# Altium PCB PCB_VOC.PcbDoc
Units mm, origin at the board's own origin, x right, y up, seen from the top; angles counter-clockwise.
Board outline 35 x 47.5 mm, 4 copper layers (Top Layer, Int1 (GND), Int2 (GND), Bottom Layer), stack 1.586 mm thick; 49 components, 27 nets, 197 pads, 124 vias.
Unrouted connection lines stored in the file: 1.
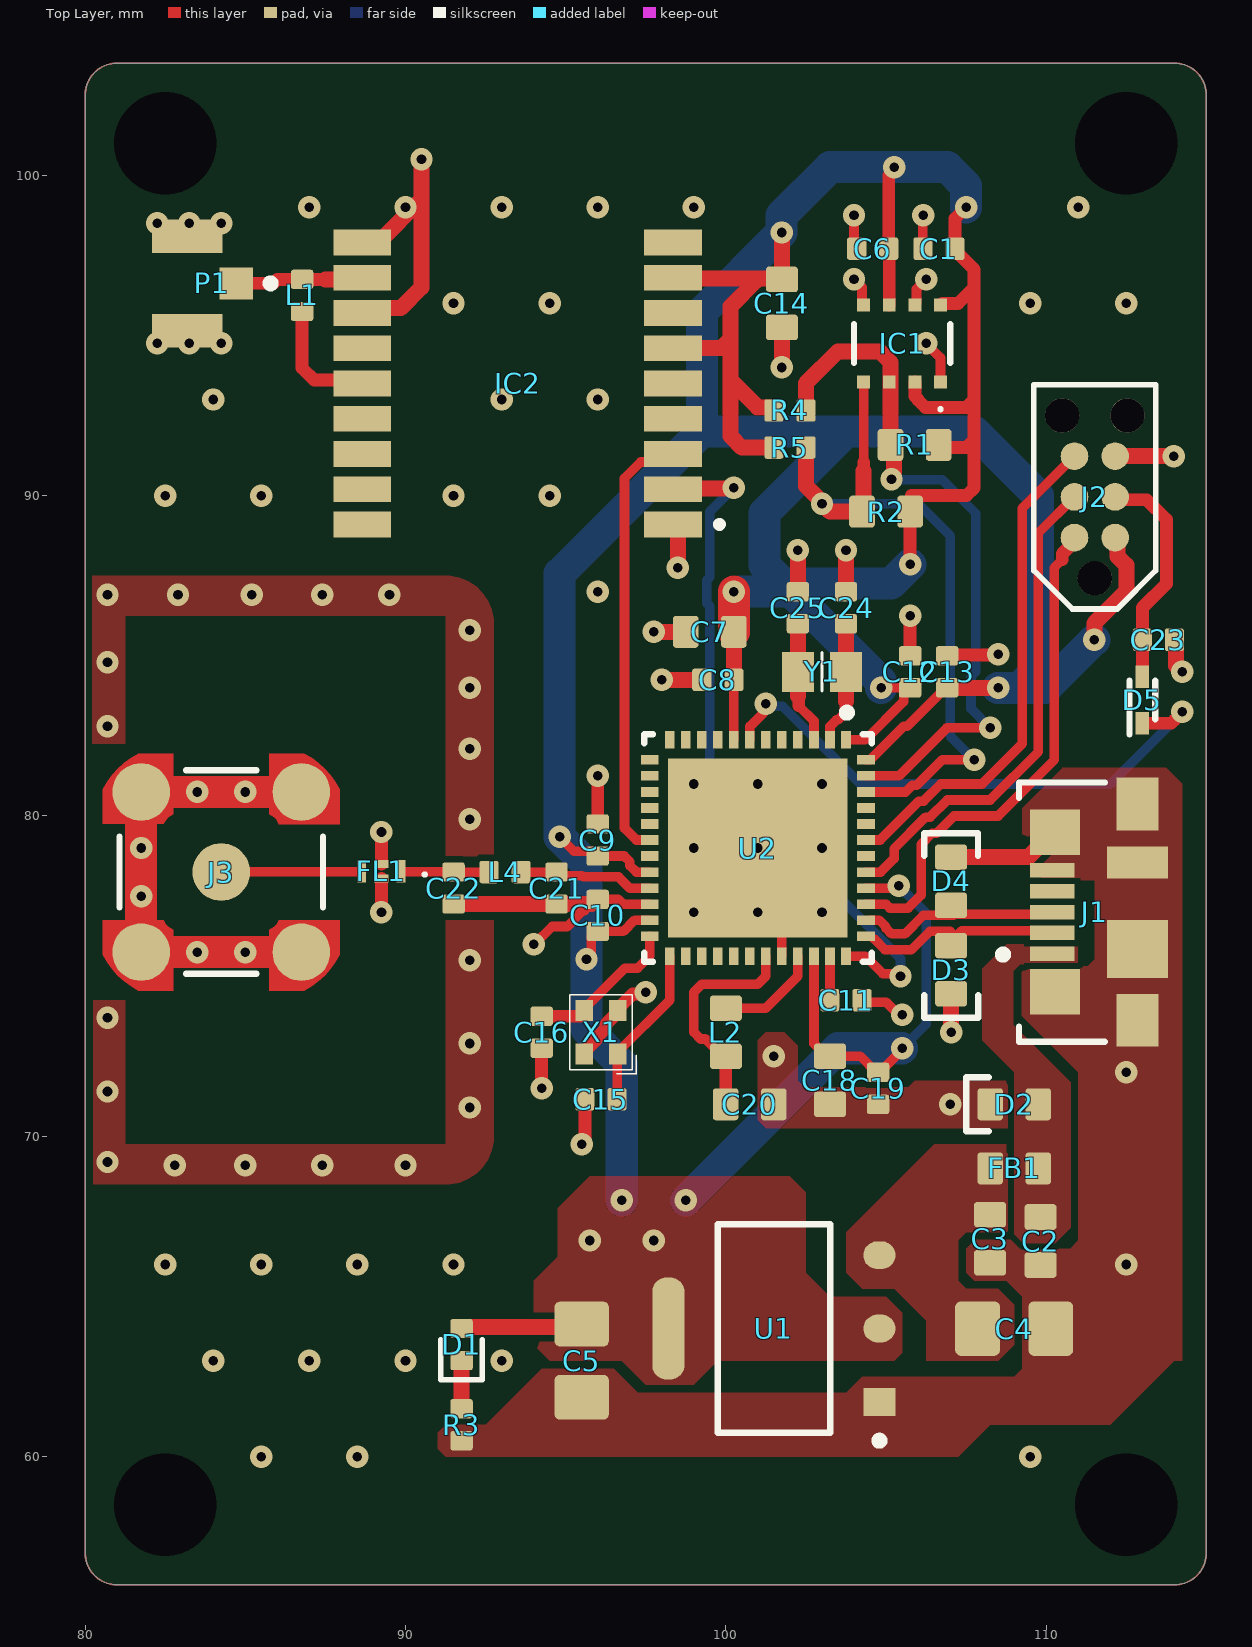
[diagram p0: Top Layer view]
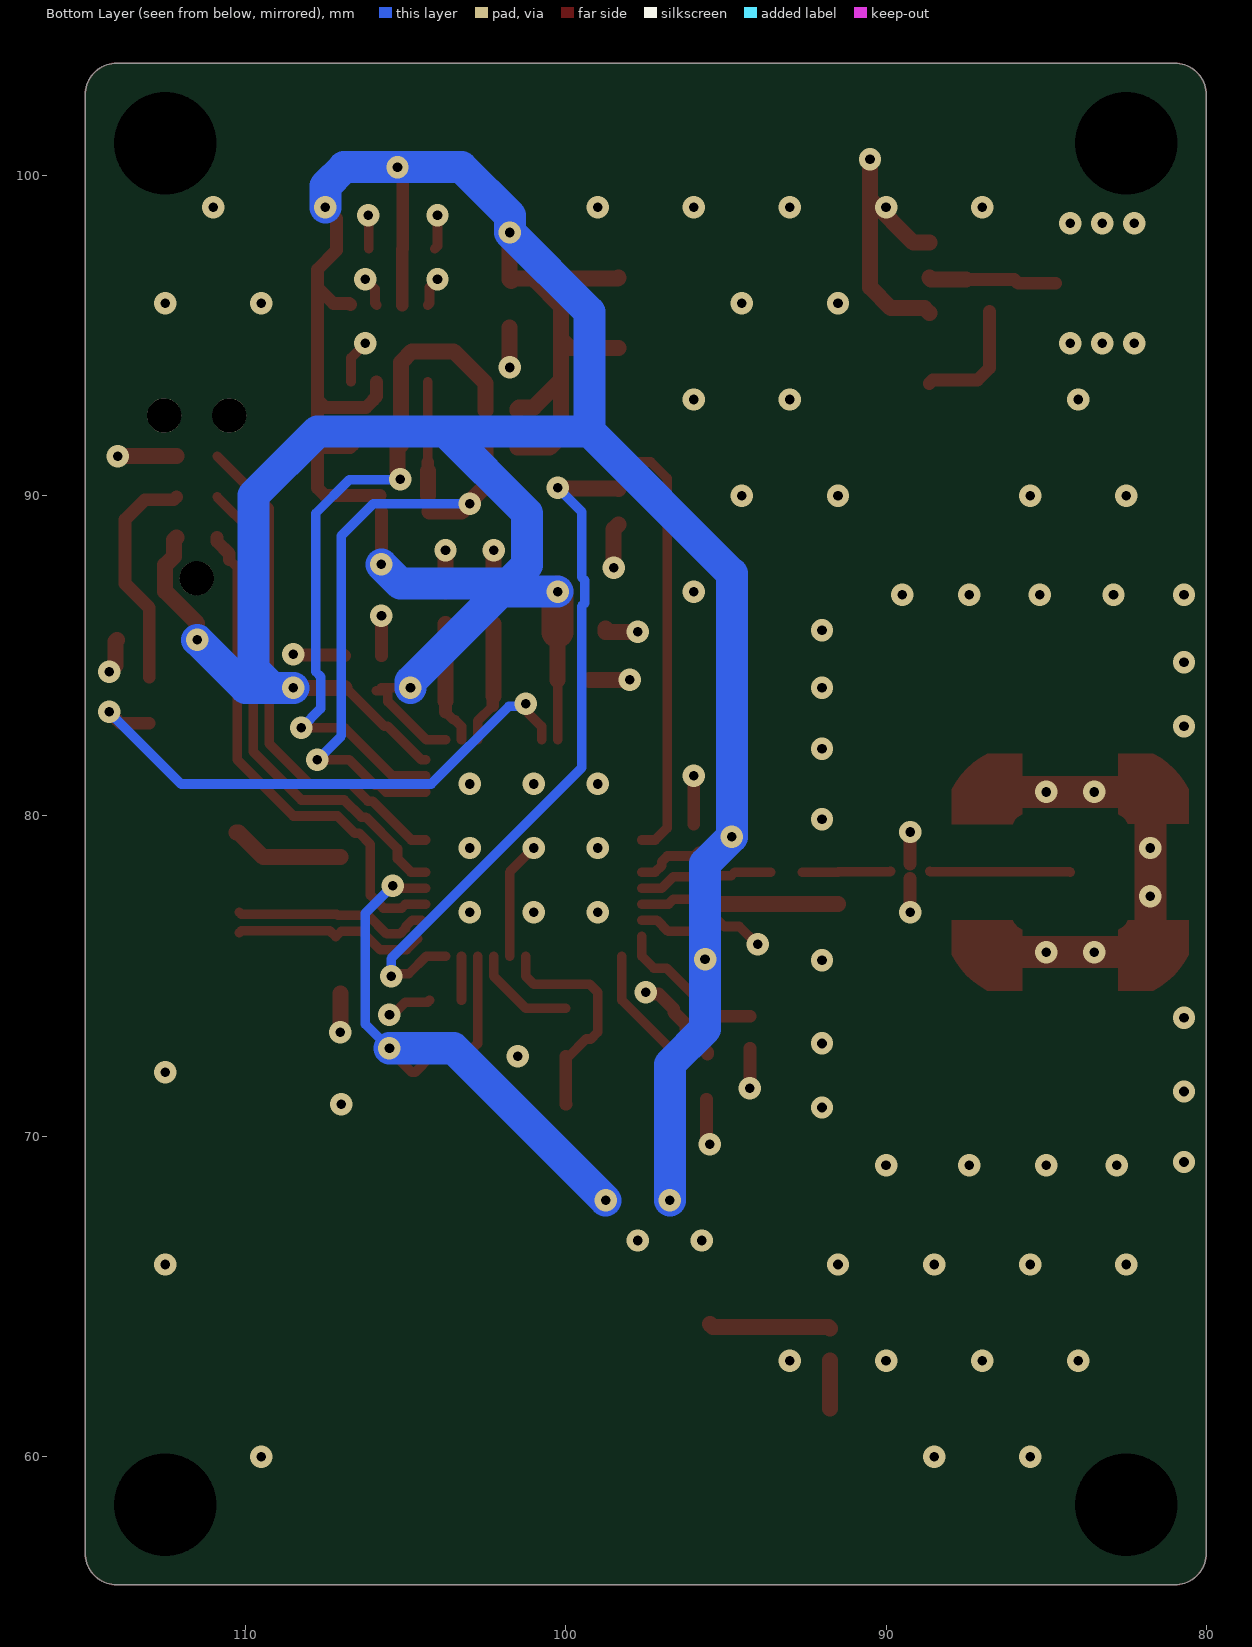
[diagram p1: Bottom Layer view, seen from below]
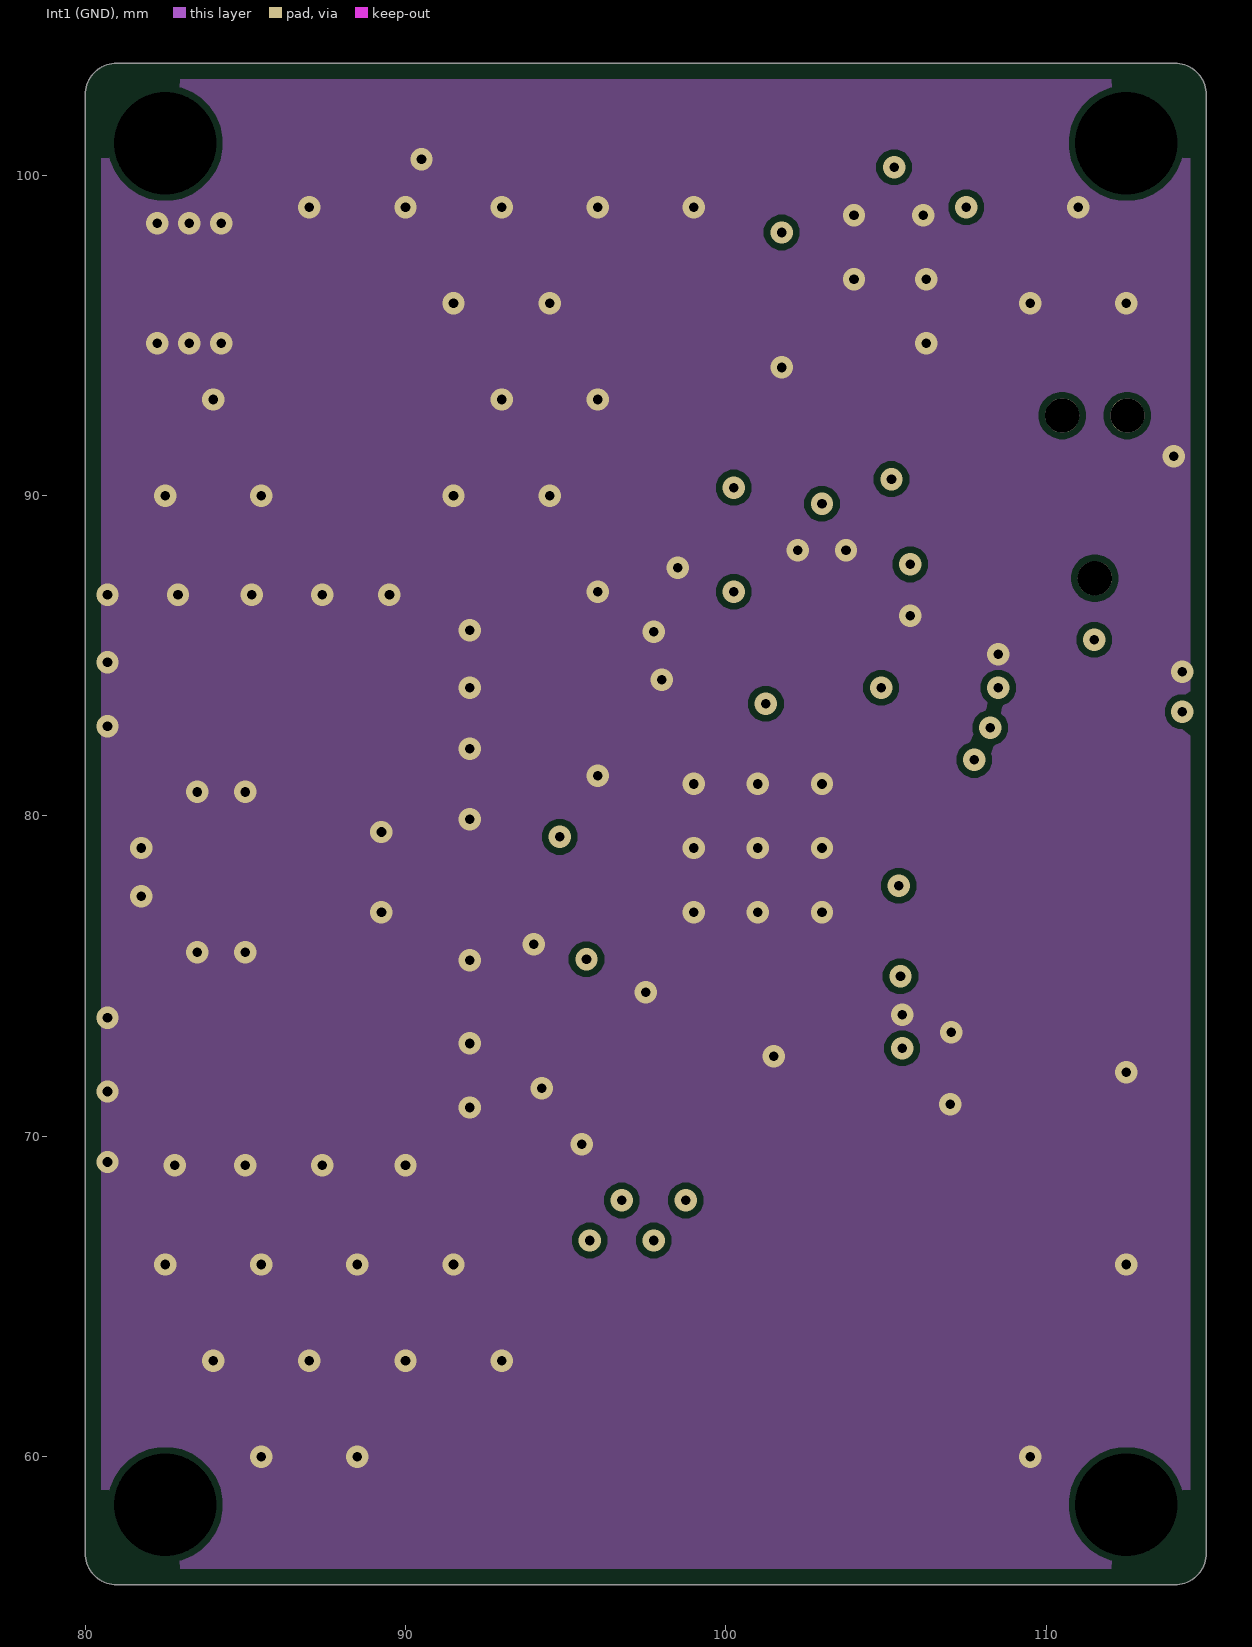
[diagram p2: Int1 (GND)]
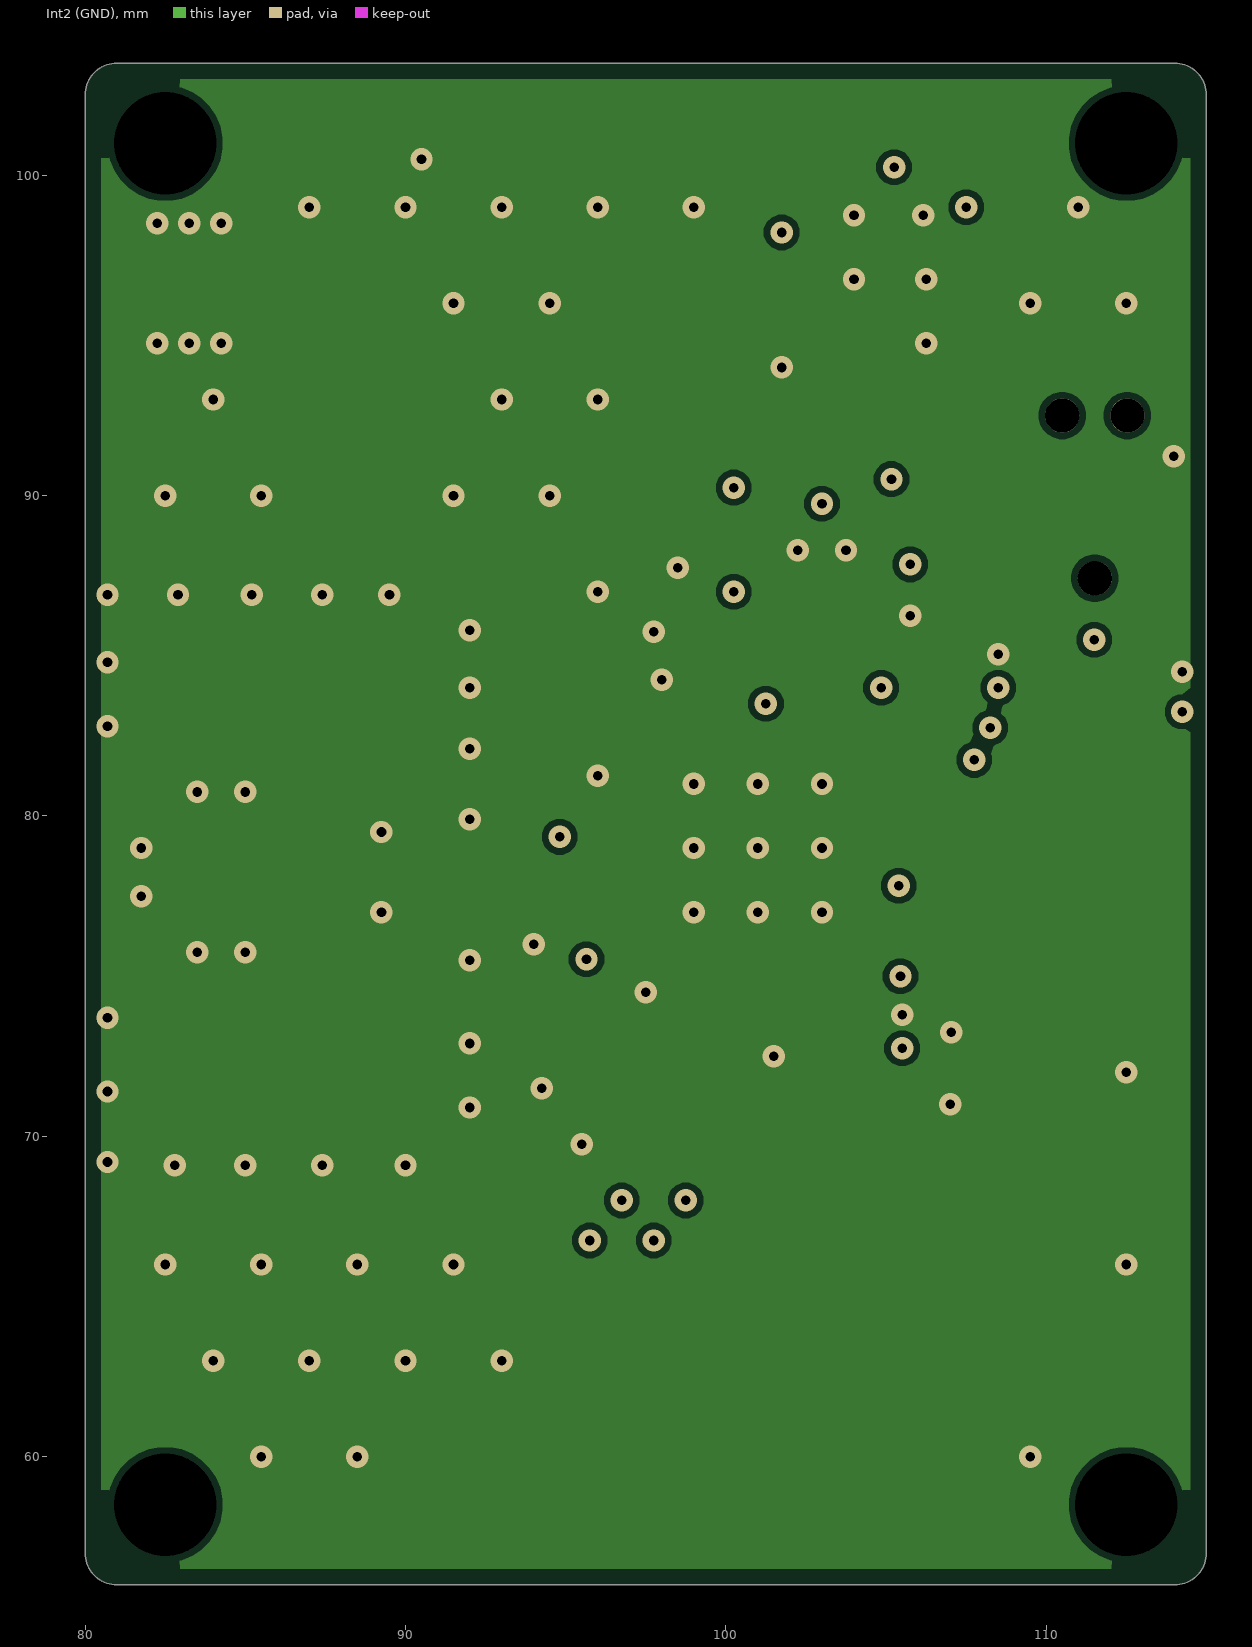
[diagram p3: Int2 (GND)]
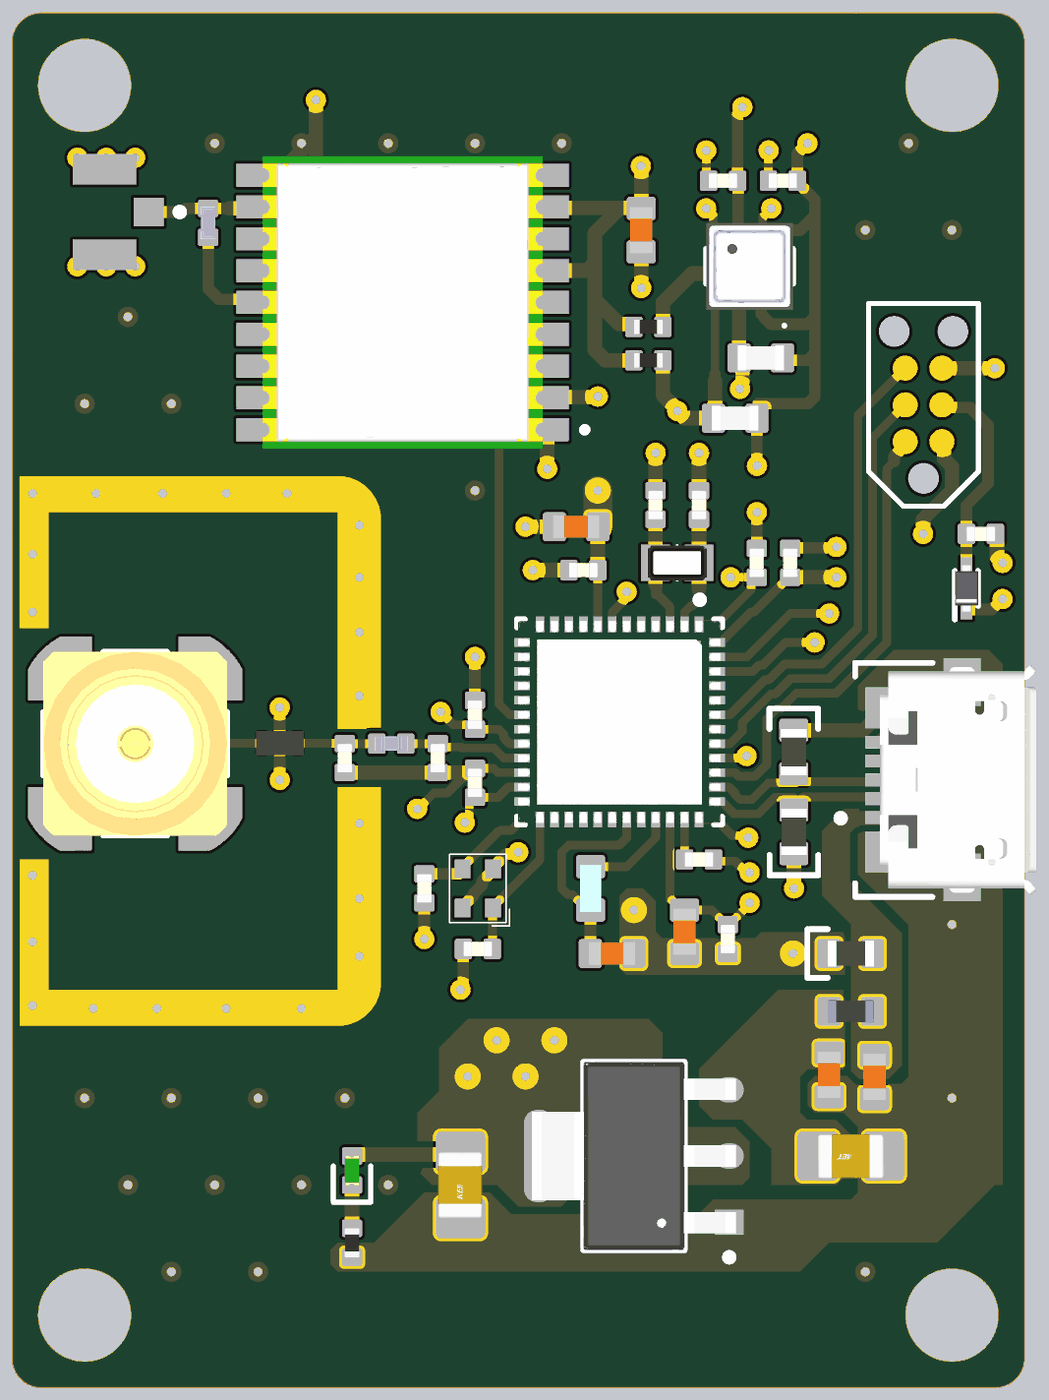
[diagram p4: 3D render of the assembled board from above, using the file's embedded part models]

## Layer stack, top to bottom
Top Solder: solder mask 0.0254, SM-001, Dk 4
Top Layer: signal copper 0.035
Dielectric 1: prepreg 0.2104, PP-017, Dk 4.4
Int1 (GND): signal copper 0.0152
Dielectric 3: core 1.065, Core-039, Dk 4.6
Int2 (GND): signal copper 0.0152
Dielectric 5: prepreg 0.2104, PP-017, Dk 4.4
Bottom Layer: signal copper 0.035
Bottom Solder: solder mask 0.0254, SM-001, Dk 4

## Board outline
80,57 80,102.5 cw(c81,102.5) 81,103.5 114,103.5 cw(c114,102.5) 115,102.5 115,57 cw(c114,57) 114,56 81,56 cw(c81,57)

## Design rules (kind name [scope] priority, off if disabled: settings)
Clearance [All] p1: gap=0.2 ignorepadtopadclearanceinfootprint=FALSE
DiffPairsRouting [All] p1: maxlimit=0.254 minlimit=0.2 mostfreqgap=0.254 toplayer_prefgap=0.225 toplayer_minwidth=0.2 toplayer_maxwidth=0.4 toplayer_prefwidth=0.296 midlayer1_mingap=0.254 midlayer1_minwidth=0.381 midlayer1_maxwidth=0.381 midlayer1_prefwidth=0.381 midlayer2_mingap=0.254 midlayer2_minwidth=0.381 midlayer2_maxwidth=0.381 midlayer2_prefwidth=0.381 bottomlayer_mingap=0.254 bottomlayer_minwidth=0.381 bottomlayer_maxwidth=0.381 bottomlayer_prefwidth=0.381 maxuncoupledlength=12.7
PolygonConnect [All] p1: connectstyle=Direct reliefconductorwidth=0.254 reliefentries=4 polygonreliefangle="90 Angle" airgapwidth=0.254
RoutingVias [All] p1: holewidth=0.711 width=1.27 viastyle="Through Hole" minholewidth=0.711 minwidth=1.27 maxholewidth=0.711 maxwidth=1.27
SolderMaskExpansion [All] p1: expansion=0.102 istentingtop=FALSE
SupplyNets "Schematic Supply Nets_2" [InNet('+3V3')] p1: voltage=0.000
SupplyNets "Schematic Supply Nets_1" [InNet('GND')] p2: voltage=0.000
SupplyNets "Schematic Supply Nets" [InNet('VBUS')] p3: voltage=0.000
UnRoutedNet [All] p1: checkbadconnections=TRUE
Width [All] p1: maxlimit=1 minlimit=0.2 preferedwidth=0.3 midlayer1_minwidth=0.254 midlayer1_maxwidth=0.254 midlayer1_prefwidth=0.254 midlayer2_minwidth=0.254 midlayer2_maxwidth=0.254 midlayer2_prefwidth=0.254 minimp=50.000000 maximp=50.000000 favimp=50.000000
28 further rules are at their usual default settings.

## Classes and differential pairs
differential pair class DIFF_USB: USB_D
differential pair USB_D: +USB_D_P -USB_D_N

## Components (designator, comment, footprint, x,y, rotation, side; value= is the part's Value field where it differs from the comment)
C1 "100nF" CAP_0402 106.651,97.707 r0 top
C2 "2.2nF" CAP_0603 109.822,66.733 r90 top
C3 "2.2nF" CAP_0603 108.247,66.806 r90 top
C4 "22uF" CAP_0805 109,64 r180 top
C5 "22uF" CAP_0805 95.5,63 r90 top
C6 "100nF" CAP_0402 104.583,97.707 r0 top
C7 "4.7uF" CAP_0603 99.5,85.75 r0 top
C8 "100nF" CAP_0402 99.75,84.25 r0 top
C9 "100nF" CAP_0402 96,79.25 r270 top
C10 "100nF" CAP_0402 96,76.898 r270 top
C11 "100nF" CAP_0402 103.75,74.25 r180 top
C12 "100nF" CAP_0402 105.75,84.5 r270 top
C13 "100nF" CAP_0402 106.907,84.5 r270 top
C14 "10uF" CAP_0603 101.75,96 r90 top
C15 "7pf" CAP_0402 96.1,71.157 r0 top
C16 "7pf" CAP_0402 94.25,73.25 r90 top
C18 "4.7uF" CAP_0603 103.25,71.75 r90 top
C19 "100nF" CAP_0402 104.75,71.5 r90 top
C20 "4.7uF" CAP_0603 100.743,71 r180 top
C21 "0.8pF" CAP_0402 94.715,77.75 r90 top
C22 "0.3pF" CAP_0402 91.5,77.75 r90 top
C23 "100nF" CAP_0402 113.5,85.5 r180 top
C24 "10pF" CAP_0402 103.75,86.5 r270 top
C25 "10pF" CAP_0402 102.25,86.5 r270 top
D1 "GREEN" LED_0402_GREEN 91.75,63.5 r270 top
D2 "D_TVS_BI_0603" D_0603 109,71 r0 top
D3 "BI_TVS" D_0603 107.032,75.202 r90 top
D4 "BI_TVS" D_0603 107.029,77.963 r270 top
D5 "BAT54KFILM" SODFL1608X70N 113,83.618 r90 top
FB1 "120" FB_0603 109,69 r180 top
FL1 "DLF162500LT-5028A1" DLF162500LT5028A1 89.25,78.273 r180 top
IC1 "BME688" BME688 105.5,94.75 r270 top
IC2 "ATGM336H-5N31" ATGM336H5N31 93.5,93.5 r0 top
J1 "473460001" FP-473460001-MFG 112.5,77 r90 top
J2 "TC2030-NL" TC2030-NL-FP 111.516,89.96 r90 top
J3 "32K10A-40ML5" ROS-32K10A-40ML5_V 84.25,78.25 r270 top
L1 "47nH" IND_0402 86.772,96.25 r90 top
L2 "10nH" IND_0603 100,73.25 r90 top
L4 "2.7nH" IND_0402 93.107,78.25 r180 top
P1 "U.FL-R-SMT(01)" HRS-U.FL-R-SMT(10)_V 83.19,96.626 r180 top
R1 "4.7k" RES_0603 105.889,91.584 r0 top
R2 "4.7k" RES_0603 105,89.5 r0 top
R3 "1k" RES_0402 91.75,61 r90 top
R4 "4.7k" RES_0402 102,92.657 r180 top
R5 "4.7k" RES_0402 102,91.5 r180 top
U1 "AMS1117-3.3" FP-AMS1117-IPC_C 101.5,64 r180 top
U2 "STM32WB55CEU6" FP-UFQFPN48-A0B9-MFG 101,79 r270 top
X1 "NX2016_32MHz" PCBComponent_1 96.1,73.25 r90 top
Y1 "NX2012_32k768" NX2012SA32768KSTDMUB1 103,84.5 r0 top

## Footprints (in the part's own frame and the unit in brackets; to place one, negate y for a bottom-side part, rotate by r counter-clockwise, add the part's x,y. Pads: shape width x height; smd on the part's side, far side on the other; paste and mask are expansions set on the pad)
ATGM336H5N31 [mm]
  rect 1.8x0.8 smd: 1(4.85,-4.4) 2(4.85,-3.3) 3(4.85,-2.2) 4(4.85,-1.1) 5(4.85,0) 6(4.85,1.1) 7(4.85,2.2) 8(4.85,3.3) 9(4.85,4.4) 10(-4.85,4.4) 11(-4.85,3.3) 12(-4.85,2.2) 13(-4.85,1.1) 14(-4.85,0) 15(-4.85,-1.1) 16(-4.85,-2.2) 17(-4.85,-3.3) 18(-4.85,-4.4)
  silkscreen extent 6.2,-4.5 6.4,-4.3, body extent -4.85,-5.05 4.85,5.05, height 2.4
BME688 [mm]
  rect 0.4x0.4 smd: 1(1.2,1.2) 2(1.2,0.4) 3(1.2,-0.4) 4(1.2,-1.2) 5(-1.2,-1.2) 6(-1.2,-0.4) 7(-1.2,0.4) 8(-1.2,1.2)
  silkscreen extent -0.6,-1.5 2.1,1.5, body extent -1.5,-1.5 1.5,1.5, height 0.93
CAP_0402 [mm]
  rrect25% 0.6x0.7 smd: 1(-0.5,0) 2(0.5,0)
  body extent -0.5,-0.26 0.5,0.26, height 0.37
CAP_0603 [mm]
  rrect25% 0.8x1 smd: 1(-0.75,0) 2(0.75,0)
  body extent -0.8,-0.4 0.8,0.4, height 0.51
CAP_0805 [mm]
  rrect25% 1.4x1.7 smd: 1(-1.143,0) 2(1.143,0)
  body extent -1.15,-0.76 1.15,0.79, height 1.01
D_0603 [mm]
  rrect25% 0.8x1 smd: A(0.75,0) K(-0.75,0)
  silkscreen extent -1.5,-0.84 -0.8,0.84, body extent -0.8,-0.45 0.8,0.45, height 0.81
DLF162500LT5028A1 [mm]
  rect 0.275x0.7 smd: 1(-0.612,0) 3(0.613,0)
  rect 0.45x0.245 smd: 2(0,-0.227) 4(0,0.227)
  silkscreen extent -1.4,0.05 -1.3,0.15, body extent -0.83,-0.42 0.83,0.42, height 0.26
FB_0603 [mm]
  rrect25% 0.8x1 smd: 1(-0.75,0) 2(0.75,0)
  body extent -0.8,-0.4 0.8,0.4, height 0.81
FP-473460001-MFG [mm]
  rect 0.45x1.38 smd paste+0 mask+0: 1(-1.3,2.31) 2(-0.65,2.31) 3(0,2.31) 4(0.65,2.31) 5(1.3,2.31)
  rect 1.425x1.55 smd paste+0 mask+0: 6(-2.488,2.225) 7(2.488,2.225)
  rect 1.65x1.3 smd paste+0 mask+0: 8(-3.375,-0.35) 11(3.375,-0.35)
  rect 1.8x1.9 smd paste+0 mask+0: 9(-1.15,-0.35)
  rect 1x1.9 smd paste+0 mask+0: 10(1.55,-0.35)
  silkscreen extent -4.05,0.67 4.05,3.97, body extent -4.3,-2.48 4.3,3.45, height 0.25
FP-AMS1117-IPC_C [mm]
  rect 1.004x0.872 smd paste+0 mask+0: 1(-3.295,2.29)
  rrect100% 1.004x0.872 smd paste+0 mask+0: 2(-3.295,0) 3(-3.295,-2.29)
  rrect87% 1.004x3.182 smd paste+0 mask+0: 4(3.295,0)
  silkscreen extent -3.42,-3.25 1.75,3.62, body extent -3.9,-3.35 3.9,3.35, height 0.25
FP-UFQFPN48-A0B9-MFG [mm]
  rect 0.55x0.3 smd paste+0 mask+0: 1(-3.375,2.75) 2(-3.375,2.25) 3(-3.375,1.75) 4(-3.375,1.25) 5(-3.375,0.75) 6(-3.375,0.25) 7(-3.375,-0.25) 8(-3.375,-0.75) 9(-3.375,-1.25) 10(-3.375,-1.75) 11(-3.375,-2.25) 12(-3.375,-2.75) 25(3.375,-2.75) 26(3.375,-2.25) 27(3.375,-1.75) 28(3.375,-1.25) 29(3.375,-0.75) 30(3.375,-0.25) 31(3.375,0.25) 32(3.375,0.75) 33(3.375,1.25) 34(3.375,1.75) 35(3.375,2.25) 36(3.375,2.75)
  rect 0.3x0.55 smd paste+0 mask+0: 13(-2.75,-3.375) 14(-2.25,-3.375) 15(-1.75,-3.375) 16(-1.25,-3.375) 17(-0.75,-3.375) 18(-0.25,-3.375) 19(0.25,-3.375) 20(0.75,-3.375) 21(1.25,-3.375) 22(1.75,-3.375) 23(2.25,-3.375) 24(2.75,-3.375) 37(2.75,3.375) 38(2.25,3.375) 39(1.75,3.375) 40(1.25,3.375) 41(0.75,3.375) 42(0.25,3.375) 43(-0.25,3.375) 44(-0.75,3.375) 45(-1.25,3.375) 46(-1.75,3.375) 47(-2.25,3.375) 48(-2.75,3.375)
  rect 5.6x5.6 smd paste+0 mask+0: 49(0,0)
  silkscreen extent -4.35,-3.55 3.55,3.55, body extent -3.75,-3.75 3.75,3.75, height 0.25
HRS-U.FL-R-SMT(10)_V [mm] "Connector, 3-Leads, Body 2.6x2.6mm"
  rect 1.05x1 smd: 1(-1.525,0)
  rect 2.2x1.05 smd: 2(0,-1.475) 3(0,1.475)
  silkscreen extent -2.73,-0.12 -2.48,0.12, body extent -1.3,-1.3 1.3,1.3, height 1.25
IND_0402 [mm]
  rrect25% 0.6x0.7 smd: 1(-0.5,0) 2(0.5,0)
  body extent -0.56,-0.26 0.56,0.26, height 0.67
IND_0603 [mm]
  rrect25% 0.8x1 smd: 1(-0.75,0) 2(0.75,0)
  body extent -0.81,-0.37 0.81,0.37, height 0.87
LED_0402_GREEN [mm]
  rrect25% 0.6x0.7 smd: A(-0.5,0) K(0.5,0)
  silkscreen extent -0.15,-0.65 1.1,0.65, body extent -0.51,-0.25 0.51,0.25, height 0.45
NX2012SA32768KSTDMUB1 [mm]
  rect 1x1.25 smd: 1(-0.75,0) 2(0.75,0)
  silkscreen extent 0,-0.6 0,0.6, body extent -1.02,-0.6 1.02,0.6, height 0.55
PCBComponent_1 [mm]
  rect 0.65x0.55 smd: 1(-0.675,-0.525) 2(0.675,-0.525) 3(0.675,0.525) 4(-0.675,0.525)
  silkscreen extent -1.3,-1.1 1.17,0.97
RES_0402 [mm]
  rrect25% 0.6x0.7 smd: 1(-0.5,0) 2(0.5,0)
  body extent -0.5,-0.25 0.5,0.25, height 0.3
RES_0603 [mm]
  rrect25% 0.8x1 smd: 1(-0.75,0) 2(0.75,0)
  body extent -0.8,-0.43 0.8,0.43, height 0.52
ROS-32K10A-40ML5_V [mm] "SMA Straight Jack, Press-Fit, 6.35x6.35x9.5mm, Rosenberger Recommended"
  round 1.8 smd: 1(0,0) MP(-2.5,2.5) MP(-2.5,-2.5) MP(2.5,2.5) MP(2.5,-2.5)
  Top Layer region: 1.8,-1.5 1.68,-1.68 1.5,-1.8 1.5,-1.8 1.5,-3.7 2.587,-3.7 3.229,-3.229 3.7,-2.587 3.7,-2.587 3.7,-1.5
  Top Layer region: -1.5,-1.8 -1.68,-1.68 -1.8,-1.5 -1.8,-1.5 -3.7,-1.5 -3.7,-2.587 -3.229,-3.229 -2.587,-3.7 -2.587,-3.7 -1.5,-3.7
  Top Layer region: -1.8,1.5 -1.68,1.68 -1.5,1.8 -1.5,1.8 -1.5,3.7 -2.587,3.7 -3.229,3.229 -3.7,2.587 -3.7,2.587 -3.7,1.5
  Top Layer region: 1.5,1.8 1.68,1.68 1.8,1.5 1.8,1.5 3.7,1.5 3.7,2.587 3.229,3.229 2.587,3.7 2.587,3.7 1.5,3.7
  silkscreen extent -3.18,-3.18 3.18,3.18, body extent -3.17,-3.17 3.18,3.18, height 9.5
SODFL1608X70N [mm]
  rect 0.7x0.42 smd: 1(-0.725,0) 2(0.725,0)
  silkscreen extent -1.07,-0.4 0.6,0.4, body extent -0.8,-0.4 0.8,0.4, height 0.7
TC2030-NL-FP [mil]
  round 33.98 smd paste-16.99: 1(-50,-25) 2(-50,25) 3(0,-25) 4(0,25) 5(50,-25) 6(50,25)
  round 42.01 hole 42.01 unplated: MH(-100,0) MH(100,-40) MH(100,40)
  silkscreen extent -138,-75 138,75

## Part data
C1 C6 C8 C9 C10 C11 C12 C13 C15 C16 C19 C21 C22 C23 C24 C25: library part CAP_0402, "Capacitor SMD 0402"
C2 C3 C7 C14 C18 C20: library part CAP_0603, "Capacitor SMD 0603"
C4 C5: library part CAP_0805, "Capacitor SMD 0805"
D1: library part LED_0402_GREEN, "LED 0402 GREEN SMD"
D2: "Diode TVS / ESD Bidirectional 0603"
D3 D4: library part D_TVS_BI_0603, "Diode TVS / ESD Bidirectional 0603"
D5: "Diode", Manufacturer_Name=STMicroelectronics, Mouser Part Number=511-BAT54KFILM, Arrow Part Number=BAT54KFILM, Arrow Price/Stock=https://www.arrow.com/en/products/bat54kfilm/stmicroelectronics?region=europe, Datasheet Link=https://www.st.com/resource/en/datasheet/bat54.pdf, Height=0.7mm, Manufacturer_Part_Number=BAT54KFILM, Mouser Price/Stock=https://www.mouser.co.uk/ProductDetail/STMicroelectronics/BAT54KFILM?qs=jZi1jxfVU95Y9ce6l3OT%252BA%3D%3D
FB1: library part FB_0603, "Ferrite Bead SMD 0603"
FL1: "Filter", Manufacturer_Name=TDK, Mouser Part Number=810-DLF16250LT5028A1, Arrow Part Number=DLF162500LT-5028A1, Arrow Price/Stock=https://www.arrow.com/en/products/dlf162500lt-5028a1/tdk?utm_currency=USD&region=nac, Datasheet Link=https://product.tdk.com/system/files/dam/doc/product/rf/rf/filter/catalog/rf_lpf_dlf162500lt-5028a1_en.pdf, Height=0.4mm, Manufacturer_Part_Number=DLF162500LT-5028A1, Mouser Price/Stock=https://www.mouser.co.uk/ProductDetail/TDK/DLF162500LT-5028A1?qs=U%2FZX79kHR%2FlwIbAISCs3qA%3D%3D
IC1: "Integrated Circuit", Manufacturer_Name=BOSCH, Mouser Part Number=262-BME688, Arrow Part Number=BME688, Arrow Price/Stock=https://www.arrow.com/en/products/bme688/bosch-sensortec?utm_currency=USD&region=nac, Datasheet Link=https://www.bosch-sensortec.com/media/boschsensortec/downloads/datasheets/bst-bme688-ds000.pdf, Height=1mm, Manufacturer_Part_Number=BME688, Mouser Price/Stock=https://www.mouser.co.uk/ProductDetail/Bosch-Sensortec/BME688?qs=IS%252B4QmGtzzqQoVDscqwx3A%3D%3D
IC2: "Integrated Circuit", Manufacturer_Name=ZHONGKEWEI, Datasheet Link=https://datasheet.lcsc.com/szlcsc/ZHONGKEWEI-ATGM336H-5N31_C90770.pdf, Height=2.6mm, Manufacturer_Part_Number=ATGM336H-5N31
J1: library part CMP-2000-05246-2, "CONN RCPT USB2.0 MICRO B SMD R/A", Current Rating=1.8A, Manufacturer=Molex, Package=0, Temperature="-30°C to +85°C", Temperature Range High=+85°C, Temperature Range Low=-30°C, Voltage Rating=30V, Automotive=No, Category=Conn, ComponentLink2Description=Datasheet, ComponentLink2URL=https://www.molex.com/webdocs/datasheets/pdf/en-us/0473460001_IO_CONNECTORS.pdf, Conn Orientation="Right Angle", Contact Material=Gold,Nickel, Device Class L1=Connectors, Device Class L2="USB Connectors", Device Class L3=unset, Digikey Description="CONN RCPT USB2.0 MICRO B SMD R/A", Footprint Url=https://www.molex.com/pdm_docs/sd/473460001_sd.pdf, Height=2.945mm, Is Female=yes, Lead Free=Yes, Manufacturer Part Number=473460001, Number Of Contacts=5, Octopart=https://octopart.com/47346-0001-molex-7164928, Pitch=0.65mm, RoHS=TRUE, Shielding=true, Usb Standard="USB 2.0"
J2: "Tag-Connect No-Solder SWD Debug Connector (No Legs) DO NOT PLACE", Manufacturer=Tag-Connect, Manufacturer Part Number=TC2030-NL-FP
J3: library part CMP-0751-00003-1, "SMA Straight Jack, Up to 12.4 GHz, -55 to 155 degC", Manufacturer=Rosenberger, ComponentLink1Description="Manufacturer URL", ComponentLink1URL=http://www.rosenberger.de, ComponentLink2Description=Datasheet, ComponentLink2URL=http://rosenberger.de/ok/images/documents/db/32K10A-40ML5.pdf, ComponentLink3Description="Package Specification", ComponentLink3URL=http://rosenberger.de/ok/images/documents/db/32K10A-40ML5.pdf, ComponentLink4Description="Series Overview / Design Note", ComponentLink4URL=http://rosenberger.de/ok/images/documents/spez/32.pdf, ComponentLink5Description="Webshop / RFQ", ComponentLink5URL=http://www.rosenberger.com/en/contact/sales/, DatasheetVersion=e00, Design Note="Footprint in library is a generic example - only application specific footprint delivers High Performance", Mounting Technology="Surface Mount", PackageDescription="SMA Straight Jack, Press-Fit, 6.35 x 6.35 x 9.5 mm", PackageReference=32K10A-40ML5, PackageVersion=e00, PartNumber=32K10A-40ML5
L1 L4: library part IND_0402, "Inductor SMD 0402"
L2: library part IND_0603, "Inductor SMD 0603"
P1: library part CMP-2000-05151-1, "CONN RECPT ULTRA-MINI COAX SMD", Centre Contact Resistance=25mohm, Contact Resistance=10mohm, Flammability Rating=UL94V-0, Frequency Max=6GHz, Insulation Resistance=500Mohm, Manufacturer="Hirose Electric", Operating Temperature Max=90degC, Operating Temperature Min=-40degC, Package Description="3-Pin Surface Mount Device, Body 2.6 x 2.6 mm", Package Reference=U.FL-R-SMT(10), Voltage Rating V AC=60V, Approval Category=UL94V-0, Body Plating=Silver, Body Style=StraightJack, Coaxial Termination=Solder, Connector Mounting=PCB, Connector Mounting Orientation=PCBoard, Connector Type=UFLCoaxial, Contact Material=PhosphorBronze, Contact Plating=Gold, Datasheet URL=http://www.farnell.com/datasheets/91524.pdf, Datasheet Version=Feb-04, External Length / Height=2.5mm, Female Contact Material=PhosphorBronze, Female Contact Plating=Gold, Impedance=50ohm, Jacket Material=LCP, Male Contact Material=Brass, Male Contact Plating=Gold, Manufacturer URL=https://www.hirose.com, Material=PhosphorBronze, Mounting Type=PCBoard, Operating Frequency Max=6GHz, Outer Contact Resistance=10mohm, Secondary Insulation Material=PBT, SVHC=NoSVHC(18-Jun-2012), Termination Method=Solder, VSWR=1.3
R1 R2: library part RES_0603, "Resistor SMD 0603"
R3 R4 R5: library part RES_0402, "Resistor SMD 0402"
U1: library part CMP-209535-000001-1, "LDO Voltage Regulators 1A, 3.3V", Dropout Voltage=1.1V, Manufacturer="Advanced Monolithic Systems", Max Junction Temp=+125°C, Max Power Dissipation=1.2W, Max Supply Voltage=15V, Nominal Supply Current=5mA, Output Current=1A, Output Voltage=3.3V, Package=AMS1117, Temperature="-40°C to +125°C", Temperature Range Low=-40°C, Automotive=No, Category=IC, ComponentLink2Description=Datasheet, ComponentLink2URL=http://www.advanced-monolithic.com/pdf/ds1117.pdf, Device Class L1="Integrated Circuits (ICs)", Device Class L2="Power Management ICs", Device Class L3="Voltage Regulators - Linear", Height=1.8mm, Ipc Land Pattern Name=SOT229P700X180-4, Lead Free=Yes, Manufacturer Part Number=AMS1117-3.3, Number Of Outputs=1, Octopart=https://octopart.com/ams1117-3.3-advanced+monolithic+systems-25899300, Output Type=Fixed, RoHS=TRUE, Standoff Height=0.64mm, Temperature Range High=+125°C
U2: library part CMP-12160-000002-1, "ULTRA-LOW-POWER DUAL CORE ARM CO", Ambient Temperature Range High=+105°C, Ambient Temperature Range Low=-40°C, Manufacturer=STMicroelectronics, Max Frequency=2480MHz, Max Junction Temp=+125°C, Max Power Dissipation=392mW, Max Supply Voltage=3.6V, Min Supply Voltage=1.71V, Package=UFQFPN48-A0B9, Temperature="-40°C to +125°C", Automotive=No, Bandwidth=2402-2480MHz, Category=IC, ComponentLink2Description=Datasheet, ComponentLink2URL=https://www.st.com/resource/en/datasheet/stm32wb55rg.pdf, Data Rate=2Mbits/s, Device Class L1="Integrated Circuits (ICs)", Device Class L2="RF Semiconductors and Devices", Device Class L3=Transceivers, Digikey Description="ULTRA-LOW-POWER DUAL CORE ARM CO", Height=0.65mm, Interface=I2C,SPI,UART,USART,USB,Other, Ipc Land Pattern Name=QFN50P700X700X57-48, Lead Free=Yes, Manufacturer Part Number=STM32WB55CEU6, Number Of Adc Channels=13, Number Of Gpio=30, Octopart=https://octopart.com/stm32wb55ceu6-stmicroelectronics-96611730, RoHS=TRUE, Sensitivity=-100dBm, Standoff Height=0mm, Temperature Range High=+125°C, Temperature Range Low=-40°C
X1: library part NX2016_32MHZ, "32 Megahertz crystal oscillator"
Y1: library part NX2012SA-32.768K-STD-MUB-1, "Crystal or Oscillator", Manufacturer_Name=NDK, Mouser Part Number=344-NX2012SA32768K1, Datasheet Link=https://www.mouser.de/datasheet/2/905/c_NX2012SA-STD-MUB-1_e-1317508.pdf, Height=0.6mm, Manufacturer_Part_Number=NX2012SA-32.768K-STD-MUB-1, Mouser Price/Stock=https://www.mouser.co.uk/ProductDetail/NDK/NX2012SA-32.768K-STD-MUB-1?qs=55YtniHzbhA%252B6%2Fl1MwFZaQ%3D%3D

## Free pads (board coordinates)
  round 0 hole 3.2: 31(82.5,58.5) 31(112.5,58.5) MH(82.5,101) ""(112.5,101)

## Via types
v1: diameter 0.7, hole 0.3, Top Layer to Bottom Layer, 93 vias
v2: diameter 0.7, hole 0.3, Top Layer to Bottom Layer, tented both sides, 31 vias

## Nets (pads, with @x,y where several pads share a name; then routed paths per layer and width w, separated by ;. In a path a pad name is that pad's centre, name@x,y a point inside that pad or via, vN(x,y) a via of type N, cw(c..) or ccw(c..) an arc to the next point about the centre after c; other vN are vias at no path point)
32k_OSC_IN: C24.2 U2.2 Y1.2 | length 3.9
  Top Layer w0.3: U2.2 103.25,82.795 103.455,83 103.5,83 103.75,83.25
  Top Layer w0.4: 103.75,83.25 103.75,83.592
  Top Layer w0.5: 103.75,83.592 Y1.2 C24.2
32k_OSC_OUT: C25.2 U2.3 Y1.1 | length 3.8
  Top Layer w0.3: 102.276,83.44 102.75,82.966 U2.3
  Top Layer w0.4: 102.25,83.75 102.276,83.724 102.276,83.44
  Top Layer w0.5: 102.25,83.75 Y1.1 C25.2
32M_OSC_IN: C15.2 U2.25 X1.1 | length 5.1
  Top Layer w0.3: C15.2 96.612,71.17 96.612,72.563 X1.1 ; X1.1@96.625,72.625 98.25,74.25 U2.25
32M_OSC_OUT: C16.2 U2.24 X1.3 | length 4.8
  Top Layer w0.3: X1.3 95.575,73.975 96.85,75.25 97.25,75.25 97.625,75.625 U2.24
  Top Layer w0.4: C16.2 95.45,73.75 95.575,73.875 X1.3
+3V3: C1.2 C5.2 C6.2 C7.2 C8.2 C9.2 C10.2 C11.2 C12.2 C13.2 C14.2 C18.2 C19.2 D1.A IC1.2 IC1.6 IC1.8 IC2.6 IC2.8 J2.1 R1.2 R2.2 R4.2 R5.2 U1.2 U1.4 U2.1 U2.8 U2.20 U2.23 U2.34 U2.35 U2.40 U2.48 | length 168.6
  Top Layer w0.3: v1(94.813,79.347) 95.26,78.9 95.85,78.9 C9.2 96.824,78.75 97,78.574 97,78.455 97.205,78.25 U2.20 ; v1(95.65,75.524) 95.8,75.675 95.8,76.248 95.95,76.398 C10.2 96.8,76.398 97.152,76.75 U2.23 ; U2.8 C8.2 ; U2.34 102.75,72.9 103.15,72.5 C18.2 104.2,72.5 104.7,72 C19.2 104.8,72 105.5,72.7 v1(105.5,72.75) ; C11.2 U2.35 ; U2.1 104.35,82.375 105.55,83.575 105.55,83.85 105.607,83.907 C12.2@105.908,83.907 ; U2.40 105.322,77.75 v1(105.396,77.824) ; U2.48 104.5,81.75 105.55,82.8 105.657,82.8 106.857,84 C13.2 ; v1(104.845,84) C12.2
  Top Layer w0.4: IC1.6 105.1,97.69 C6.2 105.083,100.002 105.25,100.169 v1(105.25,100.25) ; R2.2 105.75,87.858 v1(105.755,87.853) ; 105.795,90.005 105.8,90 107.516,90 107.75,90.234 107.75,91.75 ; IC1.2 105.9,93.1 106,93 106,92.984 106.234,92.75 107.5,92.75 107.75,93 ; R1.2 106.723,91.5 107.5,91.5 107.75,91.75 ; IC1.8@106.721,95.963 106.758,96 107.25,96 107.75,96.5 ; v1(107.5,99) 107.151,98.651 C1.2 107.151,97.657 107.75,97.058 107.75,96.5 ; 107.75,91.75 107.75,93 ; 107.75,93 107.75,96.5
  Top Layer w0.5: D1.A 91.8,64.05 95.407,64.05 C5.2 ; IC2.6 99.854,94.6 100.146,94.893 ; IC2.8 98.375,96.775 101.725,96.775 C14.2 ; C8.2 C7.2 ; 100.941,96.698 100.146,95.904 100.146,94.893 ; R5.2 100.5,91.5 100.146,91.854 100.146,94 ; R4.2 101.5,92.707 101.45,92.757 100.993,92.757 100.146,93.604 100.146,94 ; C14.2@101.698,96.698 C14.2 ; v1(101.74,98.214) 101.75,98.203 C14.2 ; C13.2 v1(108.5,84) ; v1(111.5,85.5) 111.5,86.013 112.5,87.013 112.5,87.827 112.22,88.106 112.22,88.621 J2.1 ; 100.146,94 100.146,94.893
  Top Layer w1: C7.2 v1(100.25,87)
  Bottom Layer w0.3: v1(105.396,77.824) 106.25,76.969 106.25,73.5 v1(105.5,72.75)
  Bottom Layer w1: v1(96.75,68) 96.75,72.25 95.65,73.35 v1(95.65,75.524) 95.65,78.511 v1(94.813,79.347) 94.813,87.563 99.25,92 ; v1(98.75,68) 103.5,72.75 v1(105.5,72.75) ; v1(100.25,87) 102.036,87 102.393,86.643 ; v1(104.845,84) 104.845,84.191 102.393,86.643 ; v1(105.755,87.853) 105.152,87.25 101.786,87.25 ; v1(107.5,99) 107.5,99.664 106.914,100.25 v1(105.25,100.25) 103.25,100.25 101.74,98.74 v1(101.74,98.214) 99.25,95.724 99.25,92 ; v1(108.5,84) 109.164,84 ; v1(111.5,85.5) 110,84 109.164,84 ; 99.25,92 104,92 ; 101.786,87.25 102.393,86.643 ; 101.786,87.25 101.2,87.836 101.2,89.45 103.75,92 104,92 ; 104,92 107.75,92 109.75,90 109.75,84.586 109.164,84
  other v1: 95.75,66.75 97.75,66.75
AMS_IN: C3.2 C4.2 FB1.2 U1.3
ANN_VCC: IC2.14 L1.1 | length 3.8
  Top Layer w0.4: L1.1 86.772,93.984 87.15,93.606 88.544,93.606 IC2.14
D_to_R: D1.K R3.2 | length 1.5
  Top Layer w0.5: R3.2 D1.K
Filter_In: C22.2 FL1.1 L4.2 | length 2.8
  Top Layer w0.3: FL1.1 89.873,78.262 91.488,78.262 C22.2 L4.2
GND: C1.1 C2.1 C3.1 C4.1 C5.1 C6.1 C7.1 C8.1 C9.1 C10.1 C11.1 C12.1 C13.1 C14.1 C15.1 C16.1 C18.1 C19.1 C20.1 C21.1 C22.1 C23.1 C24.1 C25.1 D2.K D3.K D4.K FL1.2 FL1.4 IC1.1 IC1.5 IC1.7 IC2.1 IC2.10 IC2.12 J1.5 J1.6 J1.7 J1.8 J1.9 J1.10 J1.11 J2.5 J3.MP P1.2 P1.3 R3.1 U1.1 U2.22 U2.32 U2.49 X1.2 X1.4 | length 69.5
  Top Layer w0.3: v1(94,76) 94.031,76 94.581,76.55 95.051,76.55 95.549,77.048 95.6,77.048 ; C10.1@95.95,77.398 96.643,77.398 96.791,77.25 U2.22 ; v1(101,79) 101.75,78.25 U2.32 ; v1(104,96.75) 104.25,96.5 104.25,96 IC1.5 ; v1(104,98.75) 104,97.79 C6.1 ; C11.1 104.308,74.192 105,74.192 105.392,73.8 v1(105.5,73.8) ; IC1.7 105.95,96 105.95,96.45 v1(106.25,96.75) ; C1.1 106.151,98.746 v1(106.157,98.753) ; v1(106.25,94.75) 106.7,94.3 IC1.1
  Top Layer w0.4: v1(89.25,77) FL1.4 ; FL1.2 v1@89.25,79.25 ; v1(94.25,71.5) C16.1 ; v1(95.5,69.75) 95.6,69.85 C15.1 ; X1.4 95.575,72.625 95.95,73 95.95,73.066 96.25,73.366 96.25,73.5 96.625,73.875 X1.2 ; C9.1 v1(96,81.25) ; X1.2@96.625,73.975 97.092,74.443 97.443,74.443 v1(97.5,74.5) ; C12.1 v1(105.75,86.25) ; C13.1 106.932,85.025 108.475,85.025 v1(108.5,85.05)
  Top Layer w0.5: IC2.12 88.8,95.85 89.85,95.85 90.5,96.5 90.5,99.25 ; IC2.10 89.15,97.9 90.5,99.25 ; v1(90.5,100.5) 90.5,99.25 ; C22.1 95.802,77.25 C10.1@95.95,77.398 ; v1(97.75,85.75) C7.1 C7.1@98.75,85.85 ; v1(98,84.25) C8.1 ; IC2.1 98.5,88.95 v1(98.5,87.75) ; v1(101.75,94) C14.1 ; C25.1 v1(102.25,88.3) ; C24.1 v1(103.75,88.3) ; D4.K 109.438,78.713 110.213,79.488 J1.7 ; D3.K 107.032,73.255 v1(107.037,73.249) ; J2.5 v1(113.98,91.23) v1@114,91.25 ; C23.1 114.05,85.45 114.05,84.7 v1(114.25,84.5)
  Top Layer w1: J3.MP@86.75,75.75 81.75,75.75 81.75,80.75 J3.MP@86.75,80.75
  other v1: 82.8,69.1 85,69.1 87.4,69.1 90,69.1 80.7,69.2 92,70.9 107,71 80.7,71.4 101.5,72.5 92,72.9 80.7,73.7 92,75.5 83.5,75.75 85,75.75 99,77 101,77 103,77 81.75,77.5 81.75,79 99,79 103,79 89.25,79.5 92,79.9 83.5,80.75 85,80.75 99,81 101,81 103,81 92,82.1 80.7,82.8 92,84 80.7,84.8 92,85.8 80.7,86.9 82.9,86.9 85.2,86.9 87.4,86.9 89.5,86.9 82.25,94.75 83.25,94.75 84.25,94.75 82.25,98.5 83.25,98.5 84.25,98.5
  other v2: 85.5,60 88.5,60 109.5,60 84,63 87,63 90,63 93,63 82.5,66 85.5,66 88.5,66 91.5,66 112.5,66 112.5,72 96,87 82.5,90 85.5,90 91.5,90 94.5,90 84,93 93,93 96,93 91.5,96 94.5,96 109.5,96 112.5,96 87,99 90,99 93,99 96,99 99,99 111,99
GNNS_AN: IC2.11 L1.2 P1.1 | length 4
  Top Layer w0.4: P1.1 85.876,96.626 86,96.75 L1.2 87.5,96.75
  Top Layer w0.5: 87.5,96.75 88.6,96.75 IC2.11
MCU_SWCLK: J2.4 U2.41 | length 15.5
  Top Layer w0.3: U2.41 104.832,78.25 105.25,78.668 105.25,78.978 106.236,79.963 106.377,79.963 106.914,80.5 108.25,80.5 109.75,82 109.75,88.829 J2.4
MCU_SWDIO: J2.2 U2.39 | length 16
  Top Layer w0.3: U2.39 104.979,77.25 104.983,77.246 105,77.246 105.123,77.124 105.686,77.124 106.096,77.534 106.096,79.116 106.443,79.463 106.584,79.463 107.121,80 108.5,80 110.25,81.75 110.25,87.75 110.5,88
  Top Layer w0.4: 110.5,88 110.5,88.184 110.881,88.565 J2.2
MCU_SWO: J2.6 U2.43 | length 15.8
  Top Layer w0.3: U2.43 104.815,79.25 106.028,80.463 106.17,80.463 106.707,81 108,81 109.25,82.25 109.25,89.599 J2.6
NRST: D5.1 U2.7 | length 17.3
  Top Layer w0.3: U2.7 100.75,82.795 101.173,83.218 101.173,83.423 v1(101.25,83.5)
  Top Layer w0.4: D5.1 113.893,82.893 114,83
  Bottom Layer w0.3: v1(101.25,83.5) 101.327,83.423 101.777,83.423 104.2,81 112,81 v1(114.25,83.25)
NRST_Conn: C23.2 D5.2 J2.3 | length 7.1
  Top Layer w0.4: J2.3 112.24,89.871 113.129,89.871 113.75,89.25 113.75,87.25 113,86.5 C23.2 D5.2
RF1: C21.2 L4.1 U2.21 | length 4.2
  Top Layer w0.3: L4.1 C21.2 94.831,78.134 95.515,78.134 95.549,78.1 96.648,78.1 96.998,77.75 U2.21
RX_STM: IC2.2 U2.36 | length 22
  Top Layer w0.3: U2.36 104.35,75.625 104.898,75.077 105.373,75.077 v1(105.45,75)
  Top Layer w0.5: IC2.2 98.375,90.225 100.225,90.225 v1(100.25,90.25)
  Bottom Layer w0.3: v1(100.25,90.25) 99.5,89.5 99.5,87.452 99.4,87.352 99.4,86.648 99.5,86.548 99.5,81.5 105.45,75.55 v1(105.45,75)
SCL_BME: IC1.4 R2.1 R5.1 U2.46 | length 22.4
  Top Layer w0.3: IC1.4 104.3,91.031 104.302,91.029 ; U2.46 105.608,80.75 105.821,80.963 105.963,80.963 106.75,81.75 v1(107.75,81.75)
  Top Layer w0.4: 104.302,90.773 104.302,91.029
  Top Layer w0.5: R5.1 102.5,90.304 103,89.804 v1(103,89.75) 103.25,89.5 R2.1 ; 104.295,90.005 104.302,90.013 104.302,90.773
  Bottom Layer w0.3: v1(103,89.75) 106,89.75 107,88.75 107,82.5 v1(107.75,81.75)
SDA_BME: IC1.3 R1.1 R4.1 U2.47 | length 22.1
  Top Layer w0.3: U2.47 105.401,81.25 106.901,82.75 v1(108.25,82.75)
  Top Layer w0.5: R4.1 102.5,93.5 103.5,94.5 104.802,94.5 105.139,94.162 R1.1 105.25,91.473 v1@105.25,90.75
  Bottom Layer w0.3: v1(105.169,90.516) 105.185,90.5 106.75,90.5 107.8,89.45 107.8,84.502 107.65,84.352 107.65,83.35 v1(108.25,82.75)
SMA_IN: FL1.3 J3.1 | length 4.4
  Top Layer w0.3: J3.1 84.262,78.262 88.625,78.262 FL1.3
SMPSFB: C20.2 L2.1 U2.31 | length 7.1
  Top Layer w0.3: L2.1@99.996,72.496 99.904,72.496 99.362,73.038 99.212,73.038 99,73.25 99,74.5 99.25,74.75 101,74.75 101.25,75 U2.31
  Top Layer w0.4: C20.2 99.996,71.004 L2.1@99.996,72.496
SMPSLX: L2.2 U2.33 | length 3.3
  Top Layer w0.3: L2.2 101.25,74 102.25,75 U2.33
TX_STM: IC2.3 U2.18 | length 13.7
  Top Layer w0.3: U2.18 97.205,79.25 96.835,79.62 96.835,90.541 97.344,91.05 98.1,91.05 IC2.3
USB_D_N: D3.A J1.2 U2.37 | length 6.1
  Top Layer w0.296: U2.37@104.619,76.172 104.966,75.825 105.793,75.825 106.372,76.404 107.003,76.404 107.176,76.231 107.36,76.415 110.125,76.415 J1.2
USB_D_P: D4.A J1.3 U2.38 | length 6.2
  Top Layer w0.296: U2.38@104.5,76.752 104.5,76.75 104.502,76.748 104.794,76.748 104.998,76.544 104.998,76.495 105.171,76.321 105.587,76.321 106.166,76.9 107.109,76.9 107.144,76.936 110.125,76.936 J1.3
VBUS: C2.2 D2.A FB1.1 J1.1
pads on no net: IC2.4 IC2.5 IC2.7 IC2.9 IC2.13 IC2.15 IC2.16 IC2.17 IC2.18 J1.4 J2.MH U2.4 U2.5 U2.6 U2.9 U2.10 U2.11 U2.12 U2.13 U2.14 U2.15 U2.16 U2.17 U2.19 U2.26 U2.27 U2.28 U2.29 U2.30 U2.42 U2.44 U2.45
copper on no net: | length 163.3
  Top Layer w0.05: 80,57 ccw(c81,57) 81,56 114,56 ccw(c114,57) 115,57 115,102.5 ccw(c114,102.5) 114,103.5 106.5,103.5 81,103.5 ccw(c81,102.5) 80,102.5 80,61 80,57

## Polygon pours and split planes (outlines as drawn)
GND on Top Layer "GND_L01_P015" (solid, pour order 15): 92.75,76.75 92.75,70 cw(c91.25,70) 91.25,68.5 80.25,68.5 80.25,74.25 81.25,74.25 81.25,69.75 91.25,69.75 91.25,76.75
GND on Top Layer "GND_L01_P012" (solid, pour order 12): 91.25,78.75 92.75,78.75 92.75,86 ccw(c91.25,86) 91.25,87.5 80,87.5 80,82.25 81.25,82.25 81.25,86.25 91.25,86.25
GND on Top Layer "GND_L01_P009" (solid, pour order 9): 103.75,62 97.25,62 96.5,62.75 94.25,62.75 92.5,61 91.25,61 91,60.75 91,60.25 91.25,60 107.25,60 108.25,61 112,61 114,63 114.25,63 114.25,81 113.75,81.5 110.5,81.5 109.25,80.25 109.25,78.5 109.75,78 111.507,78 111.507,75.522 111.3,75.315 109.367,75.315 109.234,75.182 109.234,73.766 111,72 111,66.75 110.75,66.5 109.25,66.5 108.982,66.768 107.768,66.768 107.5,66.5 107.5,65.75 107.75,65.5 108.75,65.5 109.25,65 109.25,62.75 109,62.5 104.25,62.5
GND on Top Layer "GND_L01_P011" (solid, pour order 11): 101,70.5 101.25,70.25 108.802,70.25 108.879,70.327 108.879,71.621 108.75,71.75 108.736,71.736 105.892,71.736 105.687,71.531 102.469,71.531 102.25,71.75 102.25,72.821 101.804,73.267 101.787,73.25 101.25,73.25 101,73 101,70.5
+3V3 on Top Layer "+3V3_L01_P010" (solid, pour order 10): 103.25,65 102.5,65.75 102.5,68.25 102,68.75 95.75,68.75 94.75,67.75 94.75,66.25 94,65.5 94,63.5 94.5,63 96.75,63 97.5,62.25 99,62.25 99.75,63 105.25,63 105.5,63.25 105.5,64.5 105,65
AMS_IN on Top Layer "AMS_IN_L01_P008" (solid, pour order 8): 108.5,63 109,63.5 109,64.75 108.5,65.25 107.5,65.25 107.25,65.5 107.25,66.75 107.5,67 108.75,67 108.862,67.112 108.862,69.388 108.75,69.5 108.75,69.75 106.5,69.75 103.75,67 103.75,65.75 104.25,65.25 105.25,65.25 106,64.5 106.25,64.25 106.25,63
VBUS on Top Layer "VBUS_L01_P007" (solid, pour order 7): 110.996,75.996 108.772,75.996 108,75.225 108,73 109,72 109,66.943 109.282,66.66 110.289,66.66 110.77,67.142 110.77,71.693 108.976,73.487 108.976,75.15 109.195,75.369 110.989,75.369 110.989,75.989
GND on Int1 (GND) "GND_L02_P000" (solid, pour order 0): 80.5,101 80.5,58.5 ccw(c82.5,58.5) 82.5,56.5 112.5,56.5 ccw(c112.5,58.5) 114.5,58.5 114.5,101 ccw(c112.5,101) 112.5,103 82.5,103 ccw(c82.5,101)
no net on Top Solder "NONET_L01_P-001" (solid): 81.25,82.25 81.25,86.25 91.25,86.25 91.25,78.75 92.75,78.75 92.75,86 ccw(c91.25,86) 91.25,87.5 80.25,87.5 80.25,82.25
no net on Top Solder "NONET_L01_P-001" (solid): 81.25,74.25 80.25,74.25 80.25,68.5 91.25,68.5 ccw(c91.25,70) 92.75,70 92.75,76.75 91.25,76.75 91.25,69.75 81.25,69.75
GND on Int2 (GND) "GND_L03_P001" (solid, pour order 1): 80.5,101 80.5,58.5 ccw(c82.5,58.5) 82.5,56.5 112.5,56.5 ccw(c112.5,58.5) 114.5,58.5 114.5,101 ccw(c112.5,101) 112.5,103 82.5,103 ccw(c82.5,101)

## Text inside footprints (layer, text, board x,y; h text height)
D1: Mechanical 13 "+" at 92.258,65.383 h0.5 r270